# Altium PCB Universal_Driver.PcbDoc (part 2 of 2)
Units mm, origin at the board's own origin, x right, y up, seen from the top; angles counter-clockwise.
Board outline 105.6 x 112.5 mm, 2 copper layers (Top Layer, Bottom Layer); 139 components, 137 nets, 533 pads, 143 vias.
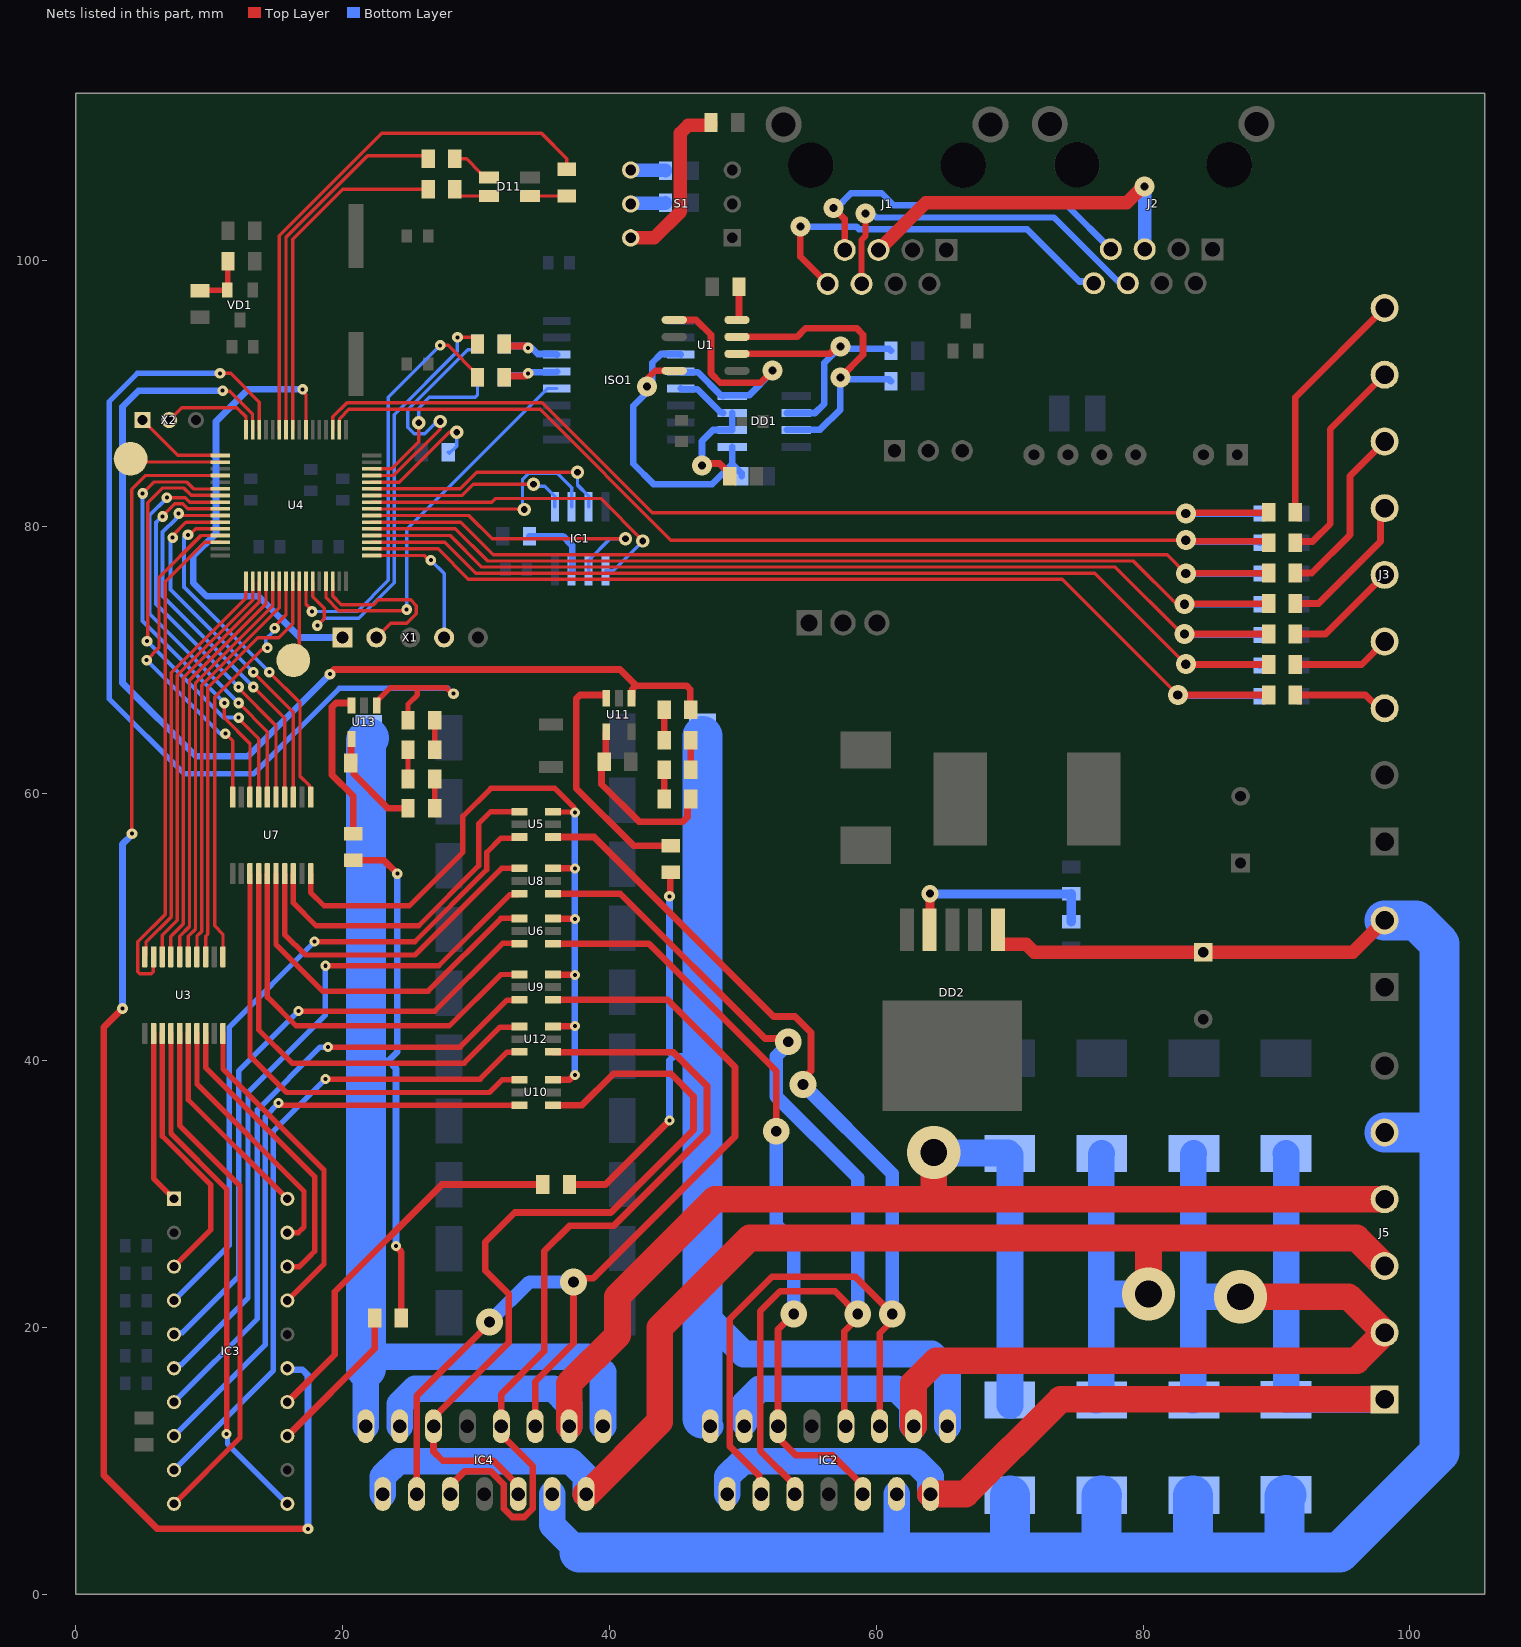
[diagram p2: the nets of this part, all layers, seen from the top]

## Via types
v1: diameter 0.8, hole 0.3, Top Layer to Bottom Layer, 49 vias
v2: diameter 0.75, hole 0.3, Top Layer to Bottom Layer, 28 vias
v3: diameter 1.5, hole 0.6, Top Layer to Bottom Layer, 19 vias
v4: diameter 2, hole 0.8, Top Layer to Bottom Layer, 12 vias
v5: diameter 1.27, hole 0.711, Top Layer to Bottom Layer, 10 vias
v6: diameter 1, hole 0.5, Top Layer to Bottom Layer, 9 vias
v7: diameter 1.5, hole 0.7, Top Layer to Bottom Layer, 8 vias
v8: diameter 4, hole 3.5, Top Layer to Bottom Layer, 4 vias
v9: diameter 4, hole 2, Top Layer to Bottom Layer, 3 vias
v10: diameter 1.3, hole 0.6, Top Layer to Bottom Layer, 1 vias

## Nets (pads, with @x,y where several pads share a name; then routed paths per layer and width w, separated by ;. In a path a pad name is that pad's centre, name@x,y a point inside that pad or via, vN(x,y) a via of type N, cw(c..) or ccw(c..) an arc to the next point about the centre after c; other vN are vias at no path point) (continued)
NetD4_1: D4.1 R10.2 U4.50 | length 77.9
  Top Layer w0.254: U4.50@22.17,78.35 27.15,78.35 29.423,76.077 73.923,76.077 v7(82.6,67.4)
  Top Layer w0.5: v7(82.6,67.4) R10.2@89.4,67.4
  Bottom Layer w0.5: v7(82.6,67.4) 82.65,67.35 88.68,67.35 D4.1@88.73,67.3
NetD5_1: D5.1 R11.2 U4.51 | length 76.6
  Top Layer w0.254: U4.51@22.17,78.85 27.65,78.85 29.969,76.531 76.369,76.531 v7(83.2,69.7) v7@83.217,69.683
  Top Layer w0.5: v7@83.217,69.683 R11.2@89.4,69.683
  Bottom Layer w0.5: v7(83.2,69.7) 83.25,69.65 88.68,69.65 D5.1@88.73,69.6
NetD6_1: D6.1 R12.2 U4.52 | length 75.9
  Top Layer w0.254: U4.52@22.17,79.35 28.05,79.35 30.415,76.985 77.915,76.985 82.933,71.967 v7(83.1,71.967)
  Top Layer w0.5: v7(83.1,71.967) R12.2@89.4,71.967
  Bottom Layer w0.5: v7(83.1,71.967) 83.133,71.933 88.697,71.933 D6.1@88.73,71.9
NetD7_1: D7.1 R13.2 U4.53 | length 75.2
  Top Layer w0.254: U4.53@22.17,79.85 28.45,79.85 30.861,77.439 79.261,77.439 82.5,74.2 v7(83.1,74.2)
  Top Layer w0.5: v7(83.1,74.2) 83.125,74.225 89.375,74.225 R13.2@89.4,74.25
  Bottom Layer w0.5: v7(83.1,74.2) D7.1@88.73,74.2
NetD8_1: D8.1 R14.2 U4.54 | length 78.3
  Top Layer w0.254: U4.54@22.17,80.35 28.85,80.35 31.3,77.9 81.8,77.9 v7(83.2,76.5) ; 85.467,76.533 R14.2@89.4,76.533
  Top Layer w0.5: v7(83.2,76.5) 83.217,76.517 85.467,76.517 89.383,76.517 R14.2@89.4,76.533
  Bottom Layer w0.5: v7(83.2,76.5) D8.1@88.73,76.5
NetD9_1: D9.1 R15.2 U4.2 | length 80.5
  Top Layer w0.254: U4.2@19.75,87.27 19.763,87.283 19.763,88.1 20.463,88.8 34.8,88.8 44.6,79 v7(83.2,79)
  Top Layer w0.5: v7(83.2,79) 83.292,78.908 89.308,78.908 R15.2@89.4,78.817
  Bottom Layer w0.5: v7(83.2,79) 83.3,78.9 88.63,78.9 D9.1@88.73,78.8
NetD10_1: D10.1 R17.2 U4.3 | length 83.3
  Top Layer w0.254: U4.3@19.25,87.27 19.263,87.283 19.263,88.242 20.321,89.3 34.942,89.3 43.192,81.05 85.95,81.05
  Top Layer w0.5: v7(83.2,81) 83.25,81.05 85.95,81.05 89.35,81.05 R17.2@89.4,81.1
  Bottom Layer w0.5: v7(83.2,81) D10.1@88.73,81
NetD11_2: D11.2 R23.2 | length 2.8
  Top Layer w0.254: D11.2@34.05,104.8 R23.2@36.8,104.8
NetD11_3: D11.3 R20.2 | length 3.1
  Top Layer w0.254: R20.2@28.4,107.6 29.281,107.6 30.327,106.554 30.327,106.523 30.65,106.2 D11.3@30.95,106.2
NetD11_4: D11.4 R21.2 | length 2.8
  Top Layer w0.254: R21.2@28.4,105.3 28.4,105.173 28.773,104.8 D11.4@30.95,104.8
NetD12_A: D12.A D16.C IC4.3 IC4.13 J5.4 | length 116.8
  Top Layer w2: IC4.3@36.97,12.58 36.97,15.77 40.6,19.4 40.6,22.3 47.9,29.6 64.3,29.6 ; v9(64.3,33.1) 64.3,29.6 ; J5.4@98.1,29.6 64.3,29.6
  Bottom Layer w2: IC4.13@24.27,12.58 24.27,14.228 25.442,15.4 35.798,15.4 36.97,14.228 IC4.3@36.97,12.58 ; v9(64.3,33.1) 64.334,33.066 69.866,33.066 70.012,32.919 70.012,14.156 D12.A@70.025,14.143
NetD13_A: D13.A D17.C IC4.2 IC4.14 J5.3 | length 118
  Top Layer w2: IC4.2@38.24,7.5 38.335,7.5 43.755,12.92 43.755,19.955 50.5,26.7 80.4,26.7 ; v9(80.4,22.5) 80.4,26.7 ; J5.3@98.1,24.6 96,26.7 80.4,26.7
  Bottom Layer w2: IC4.14@23,7.5 23,8.798 24.172,9.97 37.068,9.97 38.24,8.798 IC4.2@38.24,7.5 ; D13.A@76.475,14.543 76.85,14.918 76.85,22.5 ; D17.C@76.9,33.031 76.85,32.981 76.85,22.5 ; v9(80.4,22.5) 76.85,22.5
NetD14_A: D14.A D18.C IC2.3 IC2.13 J5.2 | length 90.7
  Top Layer w2: IC2.3@62.79,12.58 62.79,15.79 64.5,17.5 96,17.5 J5.2@98.1,19.6 98.073,19.6 95.373,22.3 v9(87.3,22.3)
  Bottom Layer w2: IC2.13@50.09,12.85 50.09,14.228 51.262,15.4 61.528,15.4 62.7,14.228 62.7,12.67 IC2.3@62.79,12.58 ; D14.A@83.725,14.543 83.75,14.568 83.75,22.3 ; D18.C@83.8,33.031 83.75,32.981 83.75,22.3 ; v9(87.3,22.3) 83.75,22.3
NetD15_A: D15.A D19.C IC2.2 IC2.14 J5.1 | length 81.6
  Top Layer w2: IC2.2@64.06,7.5 66.7,7.5 73.8,14.6 J5.1@98.1,14.6
  Bottom Layer w2: IC2.14@48.82,7.5 48.82,8.798 49.992,9.97 62.888,9.97 64.06,8.798 IC2.2@64.06,7.5 ; D19.C@90.7,33.031 90.725,33.006 90.725,14.6 90.75,14.575 90.762,14.587 98.088,14.587 J5.1@98.1,14.6
NetDD1_1: DD1.1 ISO1.11 R8.2 U1.4 | length 24.6
  Top Layer w0.5: v3(42.825,90.525) 42.825,91.098 43.427,91.7 44.845,91.7 U1.4@44.85,91.695
  Bottom Layer w0.5: ISO1.11@45.34,92.905 45.293,92.952 43.852,92.952 43.2,92.3 43.2,90.479 41.775,89.054 41.775,84.725 43.3,83.2 47.7,83.2 49.2,84.7 ; DD1.1@49.2,85.995 49.2,84.7 ; R8.2@49.9,83.8 49.9,84 49.2,84.7
NetDD1_2: DD1.2 DD1.3 ISO1.13 R7.1 | length 12.3
  Top Layer w0.5: v3(46.925,84.6) 47.075,84.75 48.25,84.75 49,84 R7.1@49,83.8
  Bottom Layer w0.5: ISO1.13@45.34,90.365 45.39,90.315 46.585,90.315 48.315,88.585 48.45,88.585 DD1.3@48.5,88.535 ; v3(46.925,84.6) 46.925,86.425 47.752,87.252 49.187,87.252 DD1.2@49.2,87.265 DD1.3@49.2,88.535
NetDD1_4: DD1.4 ISO1.12 U1.1 | length 19.8
  Top Layer w0.5: U1.1@44.85,95.505 46.495,95.505 47.6,94.4 47.6,91.5 48.3,90.8 51.307,90.8 52.2,91.693 v3(52.2,91.7)
  Bottom Layer w0.5: ISO1.12@45.34,91.635 45.39,91.585 46.62,91.585 48.35,89.855 48.45,89.855 48.5,89.805 48.55,89.855 50.455,89.855 52.2,91.6 v3(52.2,91.7)
NetDD1_6: DD1.6 R6.2 U1.6 | length 19.8
  Top Layer w0.5: U1.6@49.55,92.965 56.494,92.965 57.029,93.5 v3(57.3,93.5)
  Bottom Layer w0.5: DD1.6@53.3,88.535 55.407,88.535 56.1,89.228 56.1,92.3 v3(57.3,93.5) 57.45,93.35 60.95,93.35 R6.2@61.1,93.2
NetDD1_7: DD1.7 R5.2 U1.7 | length 24.8
  Top Layer w0.5: U1.7@49.55,94.235 54.048,94.235 54.706,94.893 58.507,94.893 59,94.4 59,92.9 v3(57.3,91.2)
  Bottom Layer w0.5: DD1.7@53.3,87.265 53.323,87.288 55.788,87.288 57.3,88.8 v3(57.3,91.2) 57.45,91.05 60.95,91.05 R5.2@61.1,90.9
NetDD2_4: DD2.4 R16.1 R18.1 | length 15.4
  Top Layer w0.7: DD2.4@64,49.8 64.05,49.85 64.025,49.875 v10(64.025,52.5)
  Bottom Layer w0.7: v10(64.025,52.5) 64.05,52.475 74.575,52.475 R16.1@74.6,52.5 R18.1@74.6,50.4
NetIC1_1: IC1.1 U4.58 | length 15.2
  Top Layer w0.254: U4.58@22.17,82.35 28.95,82.35 29.798,83.198 v6(34.3,83.198)
  Bottom Layer w0.254: v6(34.3,83.198) 34.443,83.055 35.14,83.055 35.895,82.3 IC1.1@35.895,81.5
NetIC1_2: IC1.2 U4.56 | length 19.5
  Top Layer w0.254: U4.56@22.17,81.35 22.183,81.337 33.563,81.337 v6(33.6,81.3)
  Bottom Layer w0.254: v6(33.6,81.3) 33.473,81.427 33.473,83.54 33.957,84.025 36.075,84.025 37.165,82.935 IC1.2@37.165,81.5
NetIC1_3: IC1.3 U4.59 | length 18.9
  Top Layer w0.254: U4.59@22.17,82.85 28.808,82.85 30.044,84.086 v6(37.6,84.086)
  Bottom Layer w0.254: v6(37.6,84.086) 37.6,83.135 38.435,82.3 IC1.3@38.435,81.5
NetIC1_5: IC1.5 U4.57 | length 25.5
  Top Layer w0.254: U4.57@22.17,81.85 31.186,81.85 31.463,82.127 39.343,82.127 42.5,78.97 v6(42.5,78.935)
  Bottom Layer w0.254: IC1.5@39.705,76.7 40.265,76.7 v6(42.5,78.935)
NetIC1_6: IC1.6 U4.55 | length 24
  Top Layer w0.254: U4.55@22.17,80.85 29.45,80.85 31.2,79.1 v6(41.2,79.1)
  Bottom Layer w0.254: IC1.6@38.435,76.7 38.435,77.5 40.035,79.1 v6(41.2,79.1)
NetIC1_7: IC1.7 R9.2 | length 5.4
  Bottom Layer w0.5: R9.2@34,79.3 36.5,79.3 37.2,78.6 37.2,76.735 IC1.7@37.165,76.7
NetIC2_1: IC2.1 IC2.15 R25.1 R26.1 R27.1 R28.1 R29.1 R30.1 R31.1 R32.1 R33.1 R34.1 R37.2 R53.2 | length 107.3
  Top Layer w0.5: R37.2@37,30.7 39.7,30.7 v2(44.5,35.5) ; v1(44.5,52.3) 44.55,52.35 44.55,54.05 R53.2@44.6,54.1
  Bottom Layer w0.5: v2(44.5,35.5) 44.5,40.013 44.793,40.306 ; v1(44.5,52.3) 44.5,40.599 44.793,40.306 ; R30.1@46.964,40.306 44.793,40.306
  Bottom Layer w2: IC2.15@46.964,13.166 IC2.15@47.55,12.58 ; R34.1@46.964,21.1 46.964,20.4 47.664,20.4 50.064,18 64.158,18 65.33,16.828 IC2.1@65.33,12.58
  Bottom Layer w3: IC2.15@46.964,13.166 R34.1@46.964,21.1 R33.1@46.964,25.902 R32.1@46.964,30.703 R31.1@46.964,35.505 R30.1@46.964,40.306 R29.1@46.964,45.108 R28.1@46.964,49.909 R27.1@46.964,54.711 R26.1@46.964,59.512 R25.1@46.964,64.314
NetIC2_5: IC2.5 IC2.12 U5.4 | length 87.8
  Top Layer w0.5: U5.4@35.755,56.75 38.848,56.75 52.298,43.3 53.9,43.3 55.1,42.1 55.1,39.206 54.5,38.606 v4(54.5,38.2) ; IC2.12@51.36,7.5 51.213,7.647 51.213,8.887 49.005,11.095 49.005,20.605 52.2,23.8 58.4,23.8 v4(61.2,21) 61.7,21 60.25,19.55 IC2.5@60.25,12.58
  Bottom Layer w1: v4(54.5,38.2) 61.2,31.5 v4(61.2,21)
NetIC2_6: IC2.6 IC2.11 U6.4 | length 57.7
  Top Layer w0.5: U6.4@35.755,48.75 42.95,48.75 52.5,39.2 v4(52.5,34.7) ; v4(53.8,21) 52.63,19.83 52.63,11.737 53.967,10.4 56.715,10.4 58.98,8.135 IC2.6@58.98,7.5
  Bottom Layer w1: v4(52.5,34.7) 52.5,27.7 53.8,26.4 v4(53.8,21)
NetIC2_7: IC2.7 IC2.10 U8.4 | length 77.8
  Top Layer w0.5: U8.4@35.755,52.5 40.8,52.5 51.65,41.65 53.15,41.65 v4(53.4,41.4) ; IC2.10@53.9,7.5 53.9,8.135 51.3,10.735 51.3,21.21 52.79,22.7 56.9,22.7 v4(58.6,21) 58.6,20.7 57.6,19.7 57.6,12.69 IC2.7@57.71,12.58
  Bottom Layer w1: v4(53.4,41.4) 53.4,41.214 52.5,40.314 52.5,37.3 58.6,31.2 v4(58.6,21)
NetIC3_1: IC3.1 U3.12 | length 13
  Top Layer w0.4: U3.12@5.825,42.03 5.825,31.155 IC3.1@7.35,29.63
NetIC3_3: IC3.3 U3.13 | length 20.1
  Top Layer w0.4: U3.13@6.475,42.03 6.475,34.325 10.1,30.7 10.1,27.3 IC3.3@7.35,24.55
NetIC3_4: IC3.4 U5.3 | length 50.6
  Top Layer w0.4: v2(17.9,48.9) 25.4,48.9 30.8,54.3 30.8,55.6 31.86,56.66 33.155,56.66 U5.3@33.245,56.75
  Bottom Layer w0.4: IC3.4@7.35,22.01 11.5,26.16 11.5,42.5 v2(17.9,48.9)
NetIC3_5: IC3.5 U6.3 | length 47.1
  Top Layer w0.4: v2(16.7,43.7) 26.9,43.7 31.975,48.775 33.22,48.775 U6.3@33.245,48.75
  Bottom Layer w0.4: IC3.5@7.35,19.47 7.476,19.596 7.996,19.596 12.2,23.8 12.2,39.2 v2(16.7,43.7)
NetIC3_6: IC3.6 U8.3 | length 51.8
  Top Layer w0.4: v2(18.7,47.1) 27.2,47.1 32.51,52.41 33.155,52.41 U8.3@33.245,52.5
  Bottom Layer w0.4: IC3.6@7.35,16.93 7.529,16.93 7.788,17.189 7.889,17.189 12.9,22.2 12.9,37.6 18.7,43.4 v2(18.7,47.1)
NetIC3_7: IC3.7 U9.3 | length 47.6
  Top Layer w0.4: v2(18.9,41) 28.8,41 32.326,44.526 33.221,44.526 U9.3@33.245,44.55
  Bottom Layer w0.4: IC3.7@7.35,14.39 13.6,20.64 13.6,36.296 18.304,41 v2(18.9,41)
NetIC3_8: IC3.8 U10.3 | length 46.3
  Top Layer w0.4: v2(15.2,36.8) 15.295,36.8 15.445,36.65 U10.3@33.245,36.65
  Bottom Layer w0.4: IC3.8@7.35,11.85 14.2,18.7 14.2,35.8 v2(15.2,36.8)
NetIC3_9: IC3.9 U12.3 | length 49.4
  Top Layer w0.4: v2(18.7,38.6) 30.3,38.6 32.326,40.626 33.221,40.626 U12.3@33.245,40.65
  Bottom Layer w0.4: IC3.9@7.35,9.31 14.8,16.76 14.8,34.7 16,35.9 v2(18.7,38.6)
NetIC3_10: IC3.10 U3.15 | length 39.2
  Top Layer w0.4: IC3.10@7.35,6.77 12.3,11.72 12.3,30.6 7.775,35.125 U3.15@7.775,42.03
NetIC3_11: IC3.11 U3.14 | length 38.9
  Top Layer w0.4: U3.14@7.125,42.03 7.125,34.524 11.3,30.349 v2(11.3,12)
  Bottom Layer w0.4: v2(11.3,12) 11.367,11.933 11.367,11.253 IC3.11@15.85,6.77
NetIC3_13: IC3.13 R42.2 | length 11.6
  Top Layer w0.5: IC3.13@15.85,11.85 22.4,18.4 R42.2@22.4,20.7
NetIC3_14: IC3.14 R37.1 | length 28.7
  Top Layer w0.5: IC3.14@15.85,14.39 19.4,17.94 19.4,22.667 27.433,30.7 R37.1@35,30.7
NetIC3_15: IC3.15 U4.20 | length 112.1
  Top Layer w0.254: v1(4.2,57) 4.2,82.8 5.25,83.85 U4.20@10.83,83.85
  Top Layer w0.5: v1(3.5,43.9) 2.1,42.5 2.1,8.9 6.107,4.893 v1(17.4,4.893)
  Bottom Layer w0.5: v1(3.5,43.9) 3.5,56.219 4.2,56.919 v1(4.2,57) ; IC3.15@15.85,16.93 15.957,16.823 16.977,16.823 17.4,16.4 v1(17.4,4.893)
NetIC3_17: IC3.17 U3.20 | length 24.3
  Top Layer w0.4: U3.20@11.025,42.03 11.025,39.375 18.6,31.8 18.6,24.76 IC3.17@15.85,22.01
NetIC3_18: IC3.18 U3.18 | length 22.2
  Top Layer w0.4: U3.18@9.725,42.03 9.725,39.475 17.9,31.3 17.9,25.7 17.442,25.242 16.75,24.55 IC3.18@15.85,24.55
NetIC3_19: IC3.19 U3.17 | length 19.3
  Top Layer w0.4: U3.17@9.075,42.03 9.075,38.225 17.1,30.2 17.1,27.525 16.665,27.09 IC3.19@15.85,27.09
NetIC3_20: IC3.20 U3.16 | length 15.5
  Top Layer w0.4: U3.16@8.425,42.03 8.425,37.055 IC3.20@15.85,29.63
NetIC4_1: IC4.1 IC4.15 R42.1 R43.2 R44.2 R45.2 R46.2 R47.2 R48.2 R49.2 R50.2 R51.2 R52.2 R54.2 | length 113.3
  Top Layer w0.5: R54.2@20.8,55 23.1,55 v1(24.1,54) ; v2(24,26.1) 24,26.032 24.4,25.632 R42.1@24.4,20.7
  Bottom Layer w0.5: R44.2@21.964,40.248 22.233,39.979 23.421,39.979 ; v2(24,26.1) 24,39.4 23.421,39.979 ; v1(24.1,54) 24.1,40.658 23.421,39.979
  Bottom Layer w2: IC4.15@21.73,12.58 21.73,16.9 ; 21.73,17.8 38.338,17.8 39.51,16.628 IC4.1@39.51,12.58
  Bottom Layer w3: 21.73,16.9 21.73,63.982 21.93,64.182 R49.2@21.964,64.182
NetIC4_5: IC4.5 IC4.12 U9.4 | length 72.3
  Top Layer w0.5: IC4.12@25.54,7.5 25.54,14.84 31,20.3 v4(31,20.4) ; IC4.5@34.43,12.58 34.43,15.93 37.3,18.8 v4(37.3,23.4) 37.587,23.687 38.787,23.687 49.4,34.3 49.4,39.5 44.35,44.55 U9.4@35.755,44.55
  Bottom Layer w1: v4(31,20.4) 34,23.4 v4(37.3,23.4)
NetIC4_6: IC4.6 IC4.11 U10.4 | length 60.6
  Top Layer w0.5: IC4.6@33.16,7.5 33.16,8.135 31.295,10 27.5,10 26.81,10.69 26.81,13.215 32.45,18.855 32.45,22.499 30.675,24.275 30.675,26.376 32.899,28.6 40.1,28.6 46.3,34.8 46.3,37.3 44.6,39 40.3,39 37.95,36.65 U10.4@35.755,36.65
NetIC4_7: IC4.7 IC4.10 U12.4 | length 63.6
  Top Layer w0.5: IC4.10@28.08,7.5 28.08,8.135 29.165,9.22 31.069,9.22 32.07,8.219 32.07,6.421 32.711,5.78 33.609,5.78 34.245,6.416 34.245,9.59 31.89,11.945 31.89,14.99 35.1,18.2 35.1,25.7 37,27.6 40.3,27.6 47.3,34.6 47.3,38.1 44.79,40.61 35.795,40.61 U12.4@35.755,40.65
NetISO1_4: ISO1.4 U4.45 | length 29.4
  Top Layer w0.254: U4.45@18.75,75.93 18.75,74.672 19.703,73.719 24.719,73.719 v1(24.8,73.8)
  Bottom Layer w0.254: v1(24.8,73.8) 24.8,79.835 35.33,90.365 ISO1.4@36.06,90.365
NetISO1_5: ISO1.5 R24.2 R36.1 | length 6.1
  Top Layer w0.5: R36.1@32.1,91.2 32.2,91.3 33.7,91.3 v1(33.9,91.5)
  Bottom Layer w0.5: R24.2@32.1,91.2 32.25,91.35 33.75,91.35 v1(33.9,91.5) 33.985,91.585 36.01,91.585 ISO1.5@36.06,91.635
NetISO1_6: ISO1.6 R22.2 R35.1 | length 6.2
  Top Layer w0.5: R35.1@32.1,93.7 32.25,93.55 33.75,93.55 v1(33.9,93.4)
  Bottom Layer w0.5: R22.2@32.1,93.7 32.25,93.55 33.75,93.55 v1(33.9,93.4) 34.171,93.4 34.616,92.955 36.01,92.955 ISO1.6@36.06,92.905
NetJ1_5: J1.5 J2.5 | length 26.6
  Top Layer w1: J1.5@60.165,100.75 63.715,104.3 78.765,104.3 79.965,105.5 v3(80.1,105.5)
  Bottom Layer w1: v3(80.1,105.5) 80.107,105.493 80.107,100.808 J2.5@80.115,100.8
NetJ1_6: J1.6 J2.6 | length 27.2
  Top Layer w0.45: J1.6@58.895,98.21 58.895,101.514 59.2,101.819 v3(59.2,103.5)
  Bottom Layer w0.45: v3(59.2,103.5) 59.401,103.299 59.89,103.299 59.989,103.2 73.3,103.2 78.24,98.26 J2.6@78.845,98.26
NetJ1_7: J1.7 J2.7 | length 26.5
  Top Layer w0.5: v3(56.8,103.9) 57.625,103.075 J1.7@57.625,100.75
  Bottom Layer w0.5: v3(56.8,103.9) 57,103.9 58.1,105 60.4,105 61.3,104.1 74.275,104.1 J2.7@77.575,100.8
NetJ1_8: J1.8 J2.8 | length 28.9
  Top Layer w0.5: v3(54.3,102.5) 54.3,100.265 J1.8@56.355,98.21
  Bottom Layer w0.5: v3(54.3,102.5) 58.503,102.5 58.703,102.3 71.3,102.3 75.209,98.391 76.174,98.391 J2.8@76.305,98.26
NetJ3_3: J3.3 R10.1 | length 7.1
  Top Layer w0.5: R10.1@91.4,67.4 96.667,67.4 97.667,66.4 J3.3@98.1,66.4
NetJ3_4: J3.4 R11.1 | length 7.4
  Top Layer w0.5: R11.1@91.4,69.683 96.383,69.683 J3.4@98.1,71.4
NetJ3_5: J3.5 R12.1 | length 8.5
  Top Layer w0.5: R12.1@91.4,71.967 93.667,71.967 J3.5@98.1,76.4
NetJ3_6: J3.6 R13.1 | length 11
  Top Layer w0.5: R13.1@91.4,74.25 93.15,74.25 97.794,78.894 97.794,81.094 J3.6@98.1,81.4
NetJ3_7: J3.7 R14.1 | length 13.4
  Top Layer w0.5: R14.1@91.4,76.533 92.633,76.533 95.5,79.4 95.5,83.8 J3.7@98.1,86.4
NetJ3_8: J3.8 R15.1 | length 16.1
  Top Layer w0.5: R15.1@91.4,78.817 91.483,78.9 92.7,78.9 94.022,80.222 94.022,87.322 J3.8@98.1,91.4
NetJ3_9: J3.9 R17.1 | length 18.1
  Top Layer w0.5: R17.1@91.4,81.1 91.4,89.7 J3.9@98.1,96.4
NetR1_1: R1.1 S1.1B | length 13.2
  Top Layer w1: S1.1B@41.59,101.66 43.36,101.66 45.3,103.6 45.3,109.514 45.886,110.1 47.6,110.1 R1.1@47.6,110.3
NetR2_1: R2.1 S1.3B | length 2.6
  Bottom Layer w1: S1.3B@41.59,106.74 41.61,106.72 44.2,106.72 R2.1@44.2,106.7
NetR3_2: R3.2 U1.8 | length 2.6
  Top Layer w0.5: U1.8@49.55,95.505 49.654,95.505 49.7,95.551 R3.2@49.7,98
NetR4_1: R4.1 S1.2B | length 2.7
  Bottom Layer w1: S1.2B@41.59,104.2 41.64,104.25 44.2,104.25 R4.1@44.2,104.3
NetR19_1: R19.1 U4.60 | length 9.9
  Top Layer w0.254: U4.60@22.17,83.35 24.25,83.35 28,87.1 v6(28.55,87.1)
  Bottom Layer w0.254: R19.1@27.9,85.6 28,85.5 28.55,86.05 v6(28.55,87.1)
NetR20_1: R20.1 U4.10 | length 27.7
  Top Layer w0.254: U4.10@15.75,87.27 15.75,101.692 21.858,107.8 26.2,107.8 R20.1@26.4,107.6
NetR21_1: R21.1 U4.9 | length 26
  Top Layer w0.254: U4.9@16.25,87.27 16.25,101.55 20,105.3 R21.1@26.4,105.3
NetR22_1: R22.1 U4.61 | length 18.8
  Top Layer w0.254: U4.61@22.17,83.85 23.82,83.85 27.3,87.33 v6(27.3,87.9)
  Bottom Layer w0.254: v6(27.3,87.9) 27.085,87.9 26.158,86.973 25.357,86.973 24.873,87.457 24.873,88.773 29.368,93.268 29.727,93.268 30.1,93.641 R22.1@30.1,93.7
NetR23_1: R23.1 U4.11 | length 40.9
  Top Layer w0.254: U4.11@15.25,87.27 15.25,101.834 22.916,109.5 34.9,109.5 36.8,107.6 R23.1@36.8,106.8
NetR24_1: R24.1 U4.62 | length 13
  Top Layer w0.254: U4.62@22.17,84.35 23.678,84.35 25.7,86.372 v6(25.7,87.8)
  Bottom Layer w0.254: v6(25.7,87.8) 25.7,88.9 26.5,89.7 29.951,89.7 30.1,89.849 R24.1@30.1,91.2
NetR35_2: R35.2 U4.43 | length 33.1
  Top Layer w0.254: U4.43@17.75,75.93 17.75,74.775 18.625,73.9 18.625,73.125 v1(18.1,72.6) ; v1(28.6,94.2) 29.6,94.2 R35.2@30.1,93.7
  Bottom Layer w0.254: v1(18.1,72.6) 18.112,72.6 18.658,73.146 21.216,73.146 23.873,75.803 23.873,88.415 28.6,93.142 v1(28.6,94.2)
NetR36_2: R36.2 U4.42 | length 32.3
  Top Layer w0.254: U4.42@17.25,75.93 17.25,74.198 17.7,73.748 v1(17.7,73.65) ; v1(27.3,93.6) 27.9,93.6 30.1,91.4 R36.2@30.1,91.2
  Bottom Layer w0.254: v1(17.7,73.65) 21.078,73.65 23.419,75.991 23.419,89.719 v1(27.3,93.6)
NetR39_2: R39.2 R40.1 VD1.2 | length 4.2
  Top Layer w0.4: R40.1@9.3,97.7 9.324,97.724 11.333,97.724 VD1.2@11.357,97.749 11.378,97.77 11.378,99.878 R39.2@11.4,99.9
NetR53_1: R53.1 U11.3 | length 18.2
  Top Layer w0.5: U11.3@39.75,67.155 39.75,67.355 39.705,67.4 37.793,67.4 37.5,67.107 37.5,60.4 41.8,56.1 R53.1@44.6,56.1
NetR54_1: R54.1 U13.3 | length 11.9
  Top Layer w0.5: U13.3@20.65,66.6 20.65,66.755 20.605,66.8 19.493,66.8 19.2,66.507 19.2,61.4 20.8,59.8 R54.1@20.8,57
NetR55_1: R55.1 R56.2 | length 2.3
  Top Layer w0.5: R56.2@44.1,64 R55.1@44.1,66.3
NetR55_2: R55.2 U4.15 U11.1 | length 83.6
  Top Layer w0.254: v1(11,90.2) 11.048,90.152 11.548,90.152 13.237,88.463 13.237,87.283 U4.15@13.25,87.27
  Top Layer w0.5: v1(19.05,68.952) 19.05,69.007 19.343,69.3 40.788,69.3 41.988,68.1 ; U11.1@41.65,67.155 41.695,67.2 41.695,67.807 41.988,68.1 ; R55.2@46.1,66.3 46.05,66.35 46.05,67.807 45.757,68.1 41.988,68.1
  Bottom Layer w0.5: v1(11,90.2) 4.7,90.2 3.5,89 3.5,68.3 9,62.8 12.898,62.8 v1(19.05,68.952)
NetR56_1: R56.1 R57.2 | length 2.2
  Top Layer w0.5: R57.2@46.1,61.8 R56.1@46.1,64
NetR57_1: R57.1 R58.2 | length 2.2
  Top Layer w0.5: R58.2@44.1,59.6 R57.1@44.1,61.8
NetR58_1: R58.1 R59.2 U11.4 | length 13.3
  Top Layer w0.5: U11.4@39.75,64.645 39.705,64.6 39.705,62.505 R59.2@39.6,62.4 39.4,62.2 39.4,60.7 42.2,57.9 45.5,57.9 45.85,58.25 45.85,59.35 R58.1@46.1,59.6
NetR60_1: R60.1 R61.2 | length 2.2
  Top Layer w0.4: R61.2@26.9,63.3 R60.1@26.9,65.5
NetR60_2: R60.2 U4.14 U13.1 | length 77.6
  Top Layer w0.254: v1(10.8,91.5) 11.6,91.5 13.75,89.35 U4.14@13.75,87.27
  Top Layer w0.4: U13.1@22.55,66.6 22.645,66.695 22.645,67.005 23.59,67.95 27.742,67.95 28.192,67.5 v1(28.3,67.5) ; R60.2@24.9,65.5 24.9,66.7 25.6,67.4 25.6,67.8
  Bottom Layer w0.4: v1(10.8,91.5) 4.6,91.5 2.5,89.4 2.5,67.1 8.1,61.5 13.351,61.5 19.751,67.9 27.866,67.9 28.266,67.5 v1(28.3,67.5)
NetR61_1: R61.1 R62.2 | length 2.2
  Top Layer w0.4: R62.2@24.9,61.1 R61.1@24.9,63.3
NetR62_1: R62.1 R63.2 | length 2.2
  Top Layer w0.4: R63.2@26.9,58.9 R62.1@26.9,61.1
NetR63_1: R63.1 R64.2 U13.4 | length 7.9
  Top Layer w0.5: U13.4@20.65,64.09 20.625,64.065 20.625,62.325 R64.2@20.6,62.3 20.85,62.05 20.85,61.45 23.4,58.9 R63.1@24.9,58.9
NetTP2_1: TP2.1 U4.41 | length 6.1
  Top Layer w0.254: TP2.1@16.3,70 16.3,70.614 16.75,71.064 U4.41@16.75,75.93
NetTP4_1: TP4.1 U4.18 | length 6.8
  Top Layer w0.254: TP4.1@4.1,85.1 4.337,84.863 10.817,84.863 U4.18@10.83,84.85
NetU3_1: U3.1 U4.39 | length 30.9
  Top Layer w0.254: U3.1@11.025,47.77 11.025,49.475 10.4,50.1 10.4,67.228 14.097,70.925 v1(14.35,70.925) ; v1(14.899,72.399) 14.899,72.547 15.75,73.398 U4.39@15.75,75.93
  Bottom Layer w0.254: v1(14.35,70.925) 14.246,71.029 14.246,71.596 14.794,72.144 14.794,72.294 v1(14.899,72.399)
NetU3_3: U3.3 U4.40 | length 31.8
  Top Layer w0.254: U3.3@9.725,47.77 9.725,49.325 9.878,49.478 9.878,67.926 13.624,71.672 15.2,71.672 16.25,72.722 U4.40@16.25,75.93
NetU3_4: U3.4 U4.38 | length 30.7
  Top Layer w0.254: U3.4@9.075,47.77 9.075,49.317 9.424,49.666 9.424,68.114 15.25,73.94 U4.38@15.25,75.93
NetU3_5: U3.5 U4.37 | length 30.8
  Top Layer w0.254: U3.5@8.425,47.77 8.425,49.309 8.97,49.854 8.97,68.302 14.75,74.082 U4.37@14.75,75.93
NetU3_6: U3.6 U4.36 | length 30.8
  Top Layer w0.254: U3.6@7.775,47.77 7.775,49.301 8.516,50.042 8.516,68.49 14.25,74.224 U4.36@14.25,75.93
NetU3_7: U3.7 U4.35 | length 30.9
  Top Layer w0.254: U3.7@7.125,47.77 7.125,49.293 8.062,50.23 8.062,68.678 13.75,74.366 U4.35@13.75,75.93
NetU3_8: U3.8 U4.34 | length 31
  Top Layer w0.254: U3.8@6.475,47.77 6.475,49.375 7.608,50.508 7.608,68.866 13.25,74.508 U4.34@13.25,75.93
NetU3_9: U3.9 U4.30 | length 37.9
  Top Layer w0.254: U3.9@5.825,47.77 5.797,47.742 5.797,46.649 5.648,46.5 4.8,46.5 4.643,46.657 4.643,48.885 6.7,50.942 6.7,75.896 9.654,78.85 U4.30@10.83,78.85
NetU3_10: U3.10 U4.33 | length 31.3
  Top Layer w0.254: U3.10@5.175,47.77 5.253,47.848 5.253,48.853 7.154,50.754 7.154,69.054 12.737,74.637 12.737,75.917 U4.33@12.75,75.93
NetU4_7: U4.7 X1.1 | length 36.3
  Top Layer w0.254: v1(17,90.3) 17,90.152 17.25,89.902 U4.7@17.25,87.27
  Bottom Layer w0.5: v1(17,90.3) 12.9,90.3 10.5,87.9 10.5,79.5 8.8,77.8 8.8,75.8 9.8,74.8 13.7,74.8 16.8,71.7 X1.1@19.98,71.7
NetU4_16: U4.16 X2.2 | length 7.4
  Top Layer w0.254: X2.2@7,88 7.927,88.927 12.073,88.927 12.75,88.25 U4.16@12.75,87.27
NetU4_17: U4.17 X2.1 | length 6.9
  Top Layer w0.254: X2.1@5,88 6.555,86.445 7.637,85.363 10.817,85.363 U4.17@10.83,85.35
NetU4_22: U4.22 U7.8 | length 32.5
  Top Layer w0.254: v1(5,82.5) 5.862,83.362 8.292,83.362 8.817,82.837 10.817,82.837 U4.22@10.83,82.85 ; v1(11.127,66.8) 11.127,65.673 13.05,63.75 U7.8@13.05,59.74
  Bottom Layer w0.3: v1(5,82.5) 5,72.927 v1(11.127,66.8)
NetU4_23: U4.23 U7.7 | length 32.4
  Top Layer w0.254: v1(5.33,71.43) 5.373,71.473 5.373,81.801 6.48,82.908 8.104,82.908 8.65,82.362 10.818,82.362 U4.23@10.83,82.35 ; v1(12.2,65.7) 12.2,65.6 13.7,64.1 U7.7@13.7,59.74
  Bottom Layer w0.3: v1(5.33,71.43) 11.059,65.7 v1(12.2,65.7)
NetU4_24: U4.24 U7.6 | length 30.8
  Top Layer w0.254: v1(6.819,82.181) 8.189,82.181 8.52,81.85 U4.24@10.83,81.85 ; v1(12.2,66.8) 14.35,64.65 U7.6@14.35,59.74
  Bottom Layer w0.3: v1(6.819,82.181) 6.819,82.175 5.5,80.856 5.5,73.5 v1(12.2,66.8)
NetU4_25: U4.25 U7.5 | length 29.6
  Top Layer w0.254: v1(6.5,80.771) 6.5,80.828 7.399,81.727 8.001,81.727 8.378,81.35 U4.25@10.83,81.35 ; v1(12.2,68) 12.2,67.9 15,65.1 U7.5@15,59.74
  Bottom Layer w0.3: v1@6.286,80.614 6,80.328 6,74.2 v1(12.2,68)
NetU4_26: U4.26 U7.4 | length 28.7
  Top Layer w0.254: v1(7.7,81) 7.85,80.85 U4.26@10.83,80.85 ; v1(13.3,68) 15.65,65.65 U7.4@15.65,59.74
  Bottom Layer w0.3: v1(7.7,81) 7.7,80.865 7.499,80.664 7.499,80.599 6.5,79.6 6.5,74.8 v1(13.3,68)
NetU4_27: U4.27 U7.3 | length 27.5
  Top Layer w0.254: v1(7.25,79.191) 7.25,79.35 8.25,80.35 U4.27@10.83,80.35 ; v1(13.3,69.1) 16.3,66.1 U7.3@16.3,59.74
  Bottom Layer w0.3: v1(7.25,79.191) 7.1,79.041 7.1,75.3 v1(13.3,69.1)
NetU4_28: U4.28 U7.1 | length 26.4
  Top Layer w0.254: v1(8.4,79.4) 8.548,79.4 8.998,79.85 U4.28@10.83,79.85 ; v1(14.5,69.1) 16.8,66.8 16.8,61.312 17.482,60.63 17.482,60.547 17.522,60.507 17.522,59.818 U7.1@17.6,59.74
  Bottom Layer w0.3: v1(8.4,79.4) 8.252,79.4 8.103,79.251 8.1,79.251 8.1,75.5 v1(14.5,69.1)
NetU4_29: U4.29 U7.10 | length 25.7
  Top Layer w0.254: v1(5.3,70) 6.227,70.927 6.227,76.199 9.378,79.35 U4.29@10.83,79.35 ; v1(11.2,64.5) 11.75,63.95 U7.10@11.75,59.74
  Bottom Layer w0.3: v1(5.3,70) 10.8,64.5 v1(11.2,64.5)
NetU4_46: U4.46 X1.2 | length 12.3
  Top Layer w0.254: U4.46@19.25,75.93 19.25,74.814 19.891,74.173 22.319,74.173 22.673,74.527 25.101,74.527 25.527,74.101 25.527,73.499 24.805,72.777 23.597,72.777 X1.2@22.52,71.7
NetU4_49: U4.49 X1.4 | length 10.8
  Top Layer w0.254: U4.49@22.17,77.85 26.102,77.85 26.452,77.5 v1(26.6,77.5)
  Bottom Layer w0.254: v1(26.6,77.5) 27.6,76.5 X1.4@27.6,71.7
NetU5_1: U5.1 U7.18 | length 25.2
  Top Layer w0.4: U7.18@16.3,54 16.3,51.8 18,50.1 25.7,50.1 30.2,54.6 30.2,57.751 31.099,58.65 U5.1@33.245,58.65
NetU5_6: U5.6 U6.6 U7.20 U8.6 U9.6 U10.6 U12.6 | length 57.5
  Top Layer w0.4: U7.20@17.6,54 17.6,52.6 18.6,51.6 25,51.6 29,55.6 29,58.3 31.1,60.4 35.899,60.4 37.333,58.965 37.333,58.667 v2@37.375,58.625 ; U5.6@35.755,58.65 35.78,58.625 v2@37.375,58.625 ; v2(37.4,58.6) v2@37.375,58.625
  Top Layer w0.5: U10.6@35.755,38.55 36.992,38.55 37.342,38.9 v2(37.4,38.9) ; U12.6@35.755,42.55 35.78,42.575 37.375,42.575 v2(37.4,42.6) ; U9.6@35.755,46.45 35.78,46.425 37.375,46.425 v2(37.4,46.4) ; U6.6@35.755,50.65 35.78,50.625 37.375,50.625 v2(37.4,50.6) ; U8.6@35.755,54.4 v2(37.4,54.4)
  Bottom Layer w0.5: v2(37.4,38.9) v2(37.4,46.4) v2(37.4,50.6) v2(37.4,54.4) v2(37.4,58.6)
NetU6_1: U6.1 U7.16 | length 27.3
  Top Layer w0.4: U7.16@15,54 15,48.7 18.5,45.2 26.4,45.2 31.85,50.65 U6.1@33.245,50.65
NetU7_13: U7.13 U10.1 | length 35.4
  Top Layer w0.4: U7.13@13.05,54 13.05,40.35 15.8,37.6 31,37.6 31.95,38.55 U10.1@33.245,38.55
NetU7_14: U7.14 U12.1 | length 33.4
  Top Layer w0.4: U7.14@13.7,54 13.7,42.3 16.2,39.8 29.1,39.8 31.8,42.5 33.195,42.5 U12.1@33.245,42.55
NetU7_15: U7.15 U9.1 | length 30.6
  Top Layer w0.4: U7.15@14.35,54 14.35,44.75 16.5,42.6 28,42.6 31.85,46.45 U9.1@33.245,46.45
NetU7_17: U7.17 U8.1 | length 25.5
  Top Layer w0.4: U7.17@15.65,54 15.65,49.454 17.204,47.9 18.196,47.9 25.404,47.9 31.904,54.4 U8.1@33.245,54.4
Vpwr: C7.1 D12.C D13.C D14.C D15.C DD2.1 IC2.4 IC4.4 J4.2 J5.5 | length 173.4
  Top Layer w1: DD2.1@69.1,49.8 69.1,48.725 69.125,48.7 71.225,48.7 71.825,48.1 C7.1@84.5,48.1 95.7,48.1 J4.2@98.1,50.5
  Bottom Layer w2: IC4.4@35.7,7.5 35.7,5.175 37.75,3.125 ; IC2.4@61.52,7.5 61.525,2.775
  Bottom Layer w3: 37.75,3.125 70.025,3.125 ; D12.C@70.025,7.407 70.025,3.125 ; D13.C@76.9,7.407 76.875,7.382 76.875,3.125 ; D14.C@83.725,7.407 83.75,7.381 83.75,3.125 ; D15.C@90.75,7.438 90.703,7.438 90.6,7.335 90.6,3.125 ; J5.5@98.1,34.6 101.9,34.6 102.225,34.275 ; J4.2@98.1,50.5 100.468,50.5 102.225,48.743 102.225,34.275 ; 70.025,3.125 76.875,3.125 ; 76.875,3.125 83.75,3.125 ; 83.75,3.125 90.6,3.125 ; 90.6,3.125 94.725,3.125 102.225,10.625 102.225,34.275
pads on no net: D1.5 D1.7 ISO1.3 ISO1.14 J1. J2. U1.5 U4.4 U4.8 U4.21 U4.44 U7.9 U7.12

## Polygon pours and split planes (outlines as drawn)
no net on Board "NONET_L-01_P-001" (solid): 10.5,87.6
GND on Top Layer "NONET_L-01_P-001" (solid, remove dead copper, pour order 2): 0,112.5 105.6,112.5 105.6,0 0,0
+3.3v on Top Layer "NONET_L-01_P-001" (solid, remove dead copper, pour order 0): 10.5,87.6 22.5,87.6 22.5,75.6 10.5,75.6
GND on Bottom Layer "NONET_L-01_P-001" (solid, remove dead copper, pour order 1): 0,112.5 105.6,112.5 105.6,0 0,0

## Silkscreen, mask and mechanical layers (free items; w line width, h text height)
Top Overlay:
  text "TER" at 39.004,102.446 h1 r270
  text "R" at 4.579,89.854 h1
  text "T" at 6.729,89.854 h1
  text "G" at 8.879,89.854 h1
  text "R" at 19.979,68.329 h1.52
  text "IN1  IN2  IN3 IN4  IN5  IN6  IN7" at 104.421,64.179 h1.52 r90
  text "+5v G" at 104.421,54.354 h1.52 r90
  text "- PWR +" at 104.421,42.704 h1.52 r90
  text "+PWR G" at 104.421,31.954 h1.52 r90
  text "A   B   C   D" at 104.421,13.904 h1.52 r90
Top Solder:
  lines w2: 36.97,12.58 36.97,15.77 40.6,19.4 40.6,22.3 47.9,29.6 98.1,29.6 ; 38.24,7.5 38.45,7.5 43.75,12.8 43.75,19.95 50.5,26.7 96,26.7 98.1,24.6 ; 62.79,12.58 62.79,15.765 64.525,17.5 96,17.5 98.1,19.6 98.075,19.6 95.375,22.3 87.3,22.3 ; 64.06,7.5 66.725,7.5 73.825,14.6 98.1,14.6 ; 64.3,29.7 64.3,33.1 ; 80.4,22.5 80.4,26.625 ; 98.1,24.6 98.1,24.6
Bottom Solder:
  lines w1.8: 23,7.5 23,8.8 24.2,10 37,10 38.24,8.76 38.24,7.5 ; 24.27,12.58 24.27,14.27 25.4,15.4 35.8,15.4 36.97,14.23 36.97,12.58 ; 48.82,7.5 48.82,8.72 50.1,10 62.8,10 64.06,8.74 64.06,7.5 ; 50.09,12.58 50.09,14.29 51.2,15.4 61.6,15.4 62.79,14.21 62.79,12.58
  lines w2: 35.7,7.5 35.7,5.2 37.725,3.175 68.675,3.175 94.65,3.175 102.25,10.775 102.25,34.6 98.1,34.6 ; 98.1,50.5 100.55,50.5 102.25,48.8 102.25,32.15
Mechanical 1:
  lines w0.254: 39.51,12.58 39.51,12.89
Board:
  the board outline again, w0.2

## Text inside footprints (layer, text, board x,y; h text height)
IC2: Top Overlay "1" at 65.775,15.305 h1.27 r180; Top Overlay "15" at 48.373,15.248 h1.27 r180; Top Overlay "2" at 64.62,6.229 h1.27 r180; Top Overlay "14" at 49.771,6.23 h1.27 r180
IC4: Top Overlay "1" at 39.955,15.305 h1.27 r180; Top Overlay "15" at 22.553,15.248 h1.27 r180; Top Overlay "2" at 38.8,6.229 h1.27 r180; Top Overlay "14" at 23.951,6.23 h1.27 r180